# EAGLE board lirc (EAGLE 3.55)
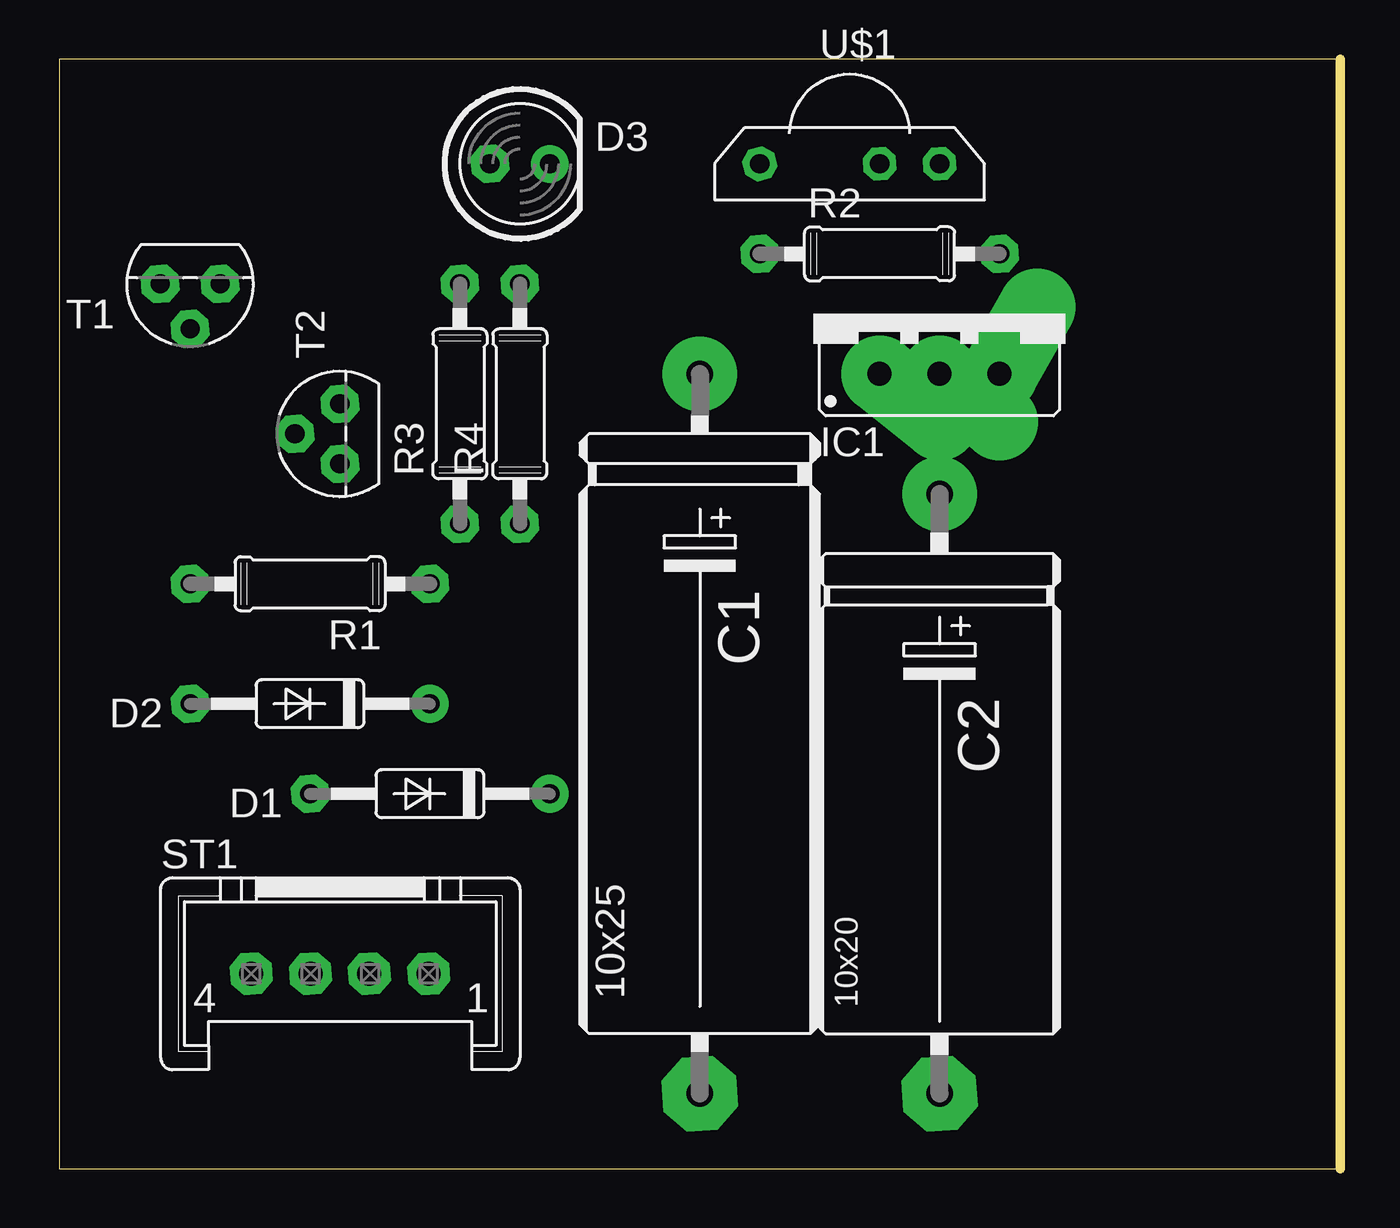
[diagram p0: board, top side]
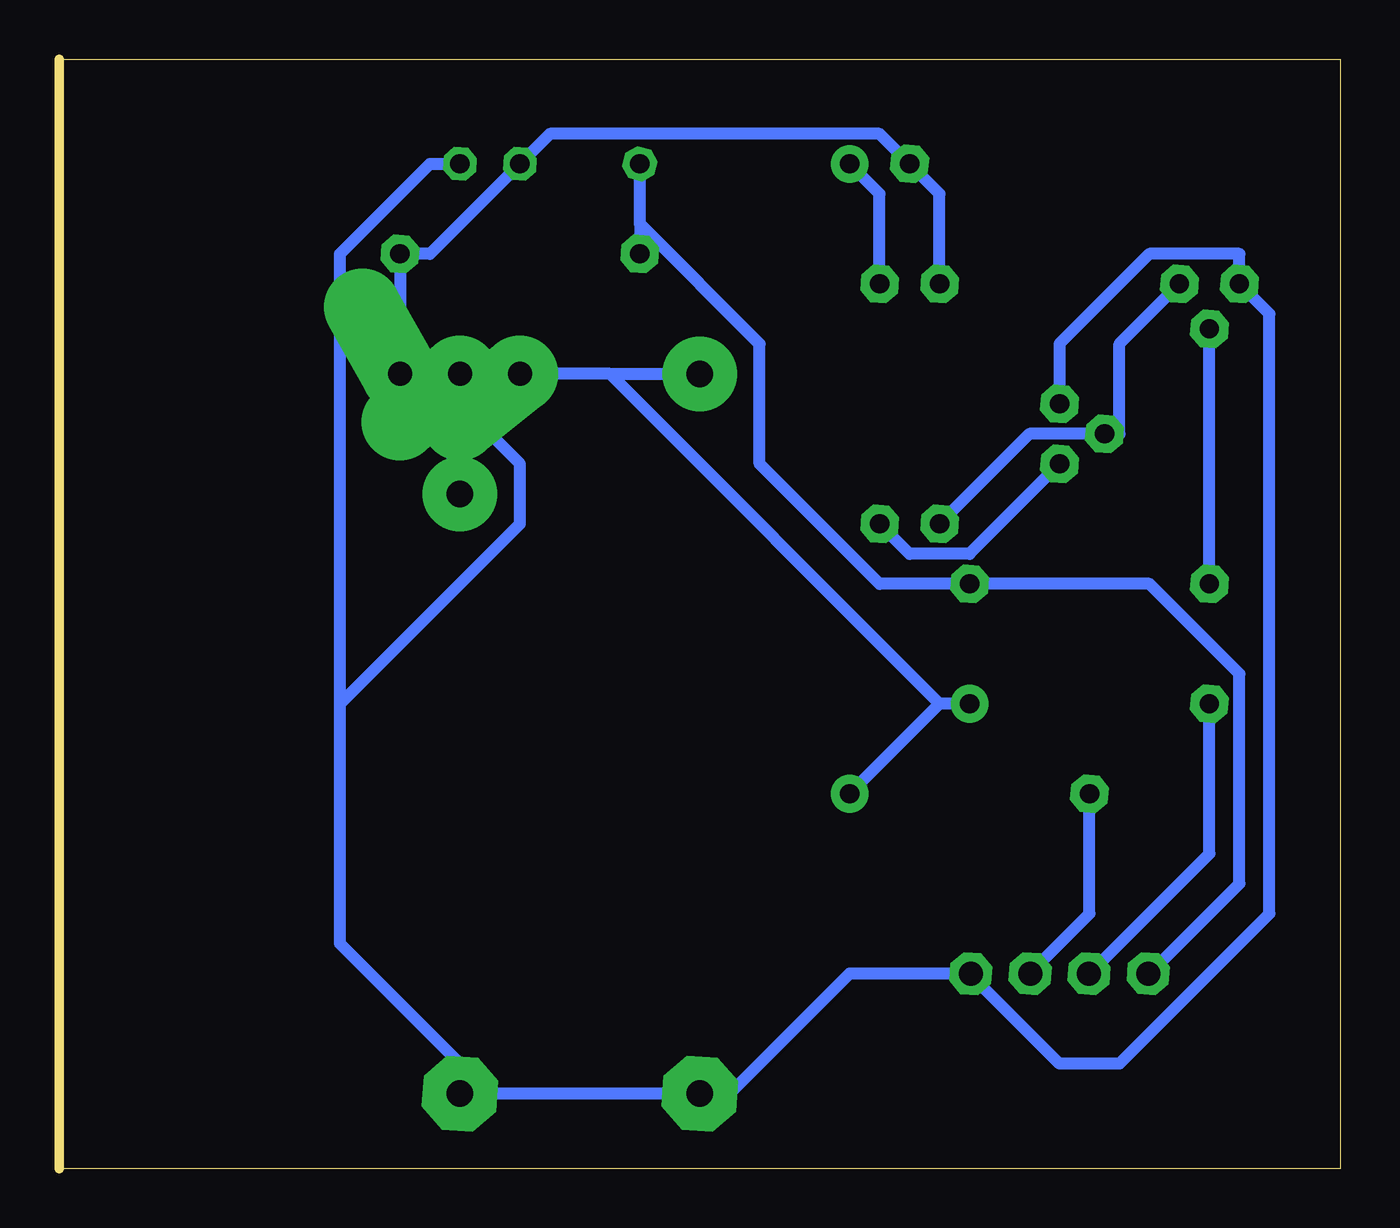
[diagram p1: board, bottom side, seen from below]

Size 54.28 x 46.98 mm. Coordinates in mm from the lower left corner, seen from the top.
Outline: 0,0 54.28,0 54.28,46.98 0,46.98 0,0
Copper layers used: Bottom

## Footprints (pad centres in the part's own frame; a part is rotated, then mirrored left to right if it is on the bottom)
0-10 = drill 1.118 pad 3.15 round:  -15.24,0 | drill 1.118 pad 3.15 octagon:  15.24,0
5-10 = drill 1.118 pad 3.15 round:  -12.7,0 | drill 1.118 pad 3.15 octagon:  12.7,0
35-10 = drill 0.813 pad 1.6 round:  -5.08,0 | drill 0.813 pad 1.6 octagon:  5.08,0
D5 = drill 0.813 pad 1.6 octagon:  -1.27,0 | drill 0.813 pad 1.6 round:  1.27,0
XXS = drill 1.016 pad 3.251 offset:  -2.54,-2.54;  0,-2.54;  2.54,-2.54
07/10 = drill 0.813 pad 1.6 octagon:  -5.08,0;  5.08,0
F4 = drill 1.016 pad 1.778 octagon:  -3.759,-2.54;  -1.245,-2.54;  1.245,-2.54;  3.759,-2.54
92 = drill 0.813 pad 1.6 octagon:  1.27,0;  0,1.905;  -1.27,0
OP = drill 0.813 pad 1.397 octagon:  -5.08,0;  2.54,0;  0,0

## Placement (x,y rotation side)
C1  100u  [0-10]  27.14,18.41 270 top
C2  47u  [5-10]  37.3,15.87 270 top
D1  1N4148  [35-10]  15.71,15.87 180 top
D2  1N4148  [35-10]  10.63,19.68 180 top
D3  LED5  [D5]  19.52,42.54 0 top
IC1  7805  [XXS]  37.3,36.19 0 top
R1  10k  [07/10]  10.63,24.76 180 top
R2  2k2  [07/10]  34.76,38.73 0 top
R3  10k  [07/10]  16.98,32.38 90 top
R4  1k  [07/10]  19.52,32.38 90 top
ST1  Serial  [F4]  11.9,10.79 0 top
T1  BC547  [92]  5.55,37.46 180 top
T2  BC547  [92]  11.9,31.11 90 top
U$1  TSOP  [OP]  34.76,42.54 0 top

## Library data of the parts
C1 C2 = polcap
D1 D2 = diode
D3 = led
IC1 = v-reg
R1-R4 = r
ST1 = con-msf
T1 T2 = npn
U$1 = titi

## Nets
GND: C1. C2. IC1. ST1. T1. T2. U$1.
N$1: C1. D1. D2. IC1.
N$2: R4. T2.
N$3: R3. T1. T2.
N$4: R1. T1.
N$5: D3. R4.
N$6: D1. ST1.
N$7: D2. ST1.
N$8: R1. R2. ST1. U$1.
VCC: C2. D3. IC1. R2. R3. U$1.

## Tracks (layer width: path | path; a pad name or v marks a point on that pad's centre or on a via)
GND
  Bottom 0.508: 37.3,42.54 38.57,42.54 42.38,38.73 42.38,19.68 | 42.38,19.68 42.38,9.52 37.3,4.44 C2. C1. 25.87,3.17 20.79,8.25 15.71,8.25 | 42.38,19.68 34.76,27.3 34.76,29.84 37.3,32.38 37.3,33.65 | 11.9,32.38 11.9,34.92 8.09,38.73 4.28,38.73 4.28,37.46 3.01,36.19 3.01,10.79 9.36,4.44 11.9,4.44 15.71,8.25 | 15.71,8.25 ST1.
N$1
  Bottom 0.508: 16.98,19.68 20.79,15.87 | 15.71,19.68 16.98,19.68 | 30.95,33.65 34.76,33.65 | 30.95,33.65 27.14,33.65 | 16.98,19.68 30.95,33.65
N$2
  Bottom 0.508: 19.52,27.3 18.25,26.03 15.71,26.03 T2.
N$3
  Bottom 0.508: 16.98,27.3 13.17,31.11 10,31.11 9.36,31.11 9.36,34.92 T1.
N$4
  Bottom 0.508: R1. 5.55,35.56
N$5
  Bottom 0.508: R4. 19.52,41.27 D3.
N$6
  Bottom 0.508: D1. 10.63,10.79 13.17,8.25 13.14,8.25
N$7
  Bottom 0.508: D2. 5.55,13.33 10.63,8.25 10.65,8.25
N$8
  Bottom 0.508: 29.68,40 29.68,38.73 | 29.68,40 29.68,42.54 | 29.68,40 24.6,34.92 24.6,29.84 19.52,24.76 15.71,24.76 8.09,24.76 4.28,20.95 4.28,12.06 8.09,8.25 8.14,8.25
VCC
  Bottom 0.508: 37.3,28.57 37.3,29.84 39.84,32.38 IC1. R2. 38.57,38.73 U$1. 33.49,43.81 19.52,43.81 18.25,42.54 16.98,41.27 R3.